# Altium PCB PCB - EE.PcbDoc
Units mm, origin at the board's own origin, x right, y up, seen from the top; angles counter-clockwise.
Board outline 152.4 x 101.6 mm, 2 copper layers (Top Layer, Bottom Layer); 23 components, 15 nets, 54 pads, 0 vias.
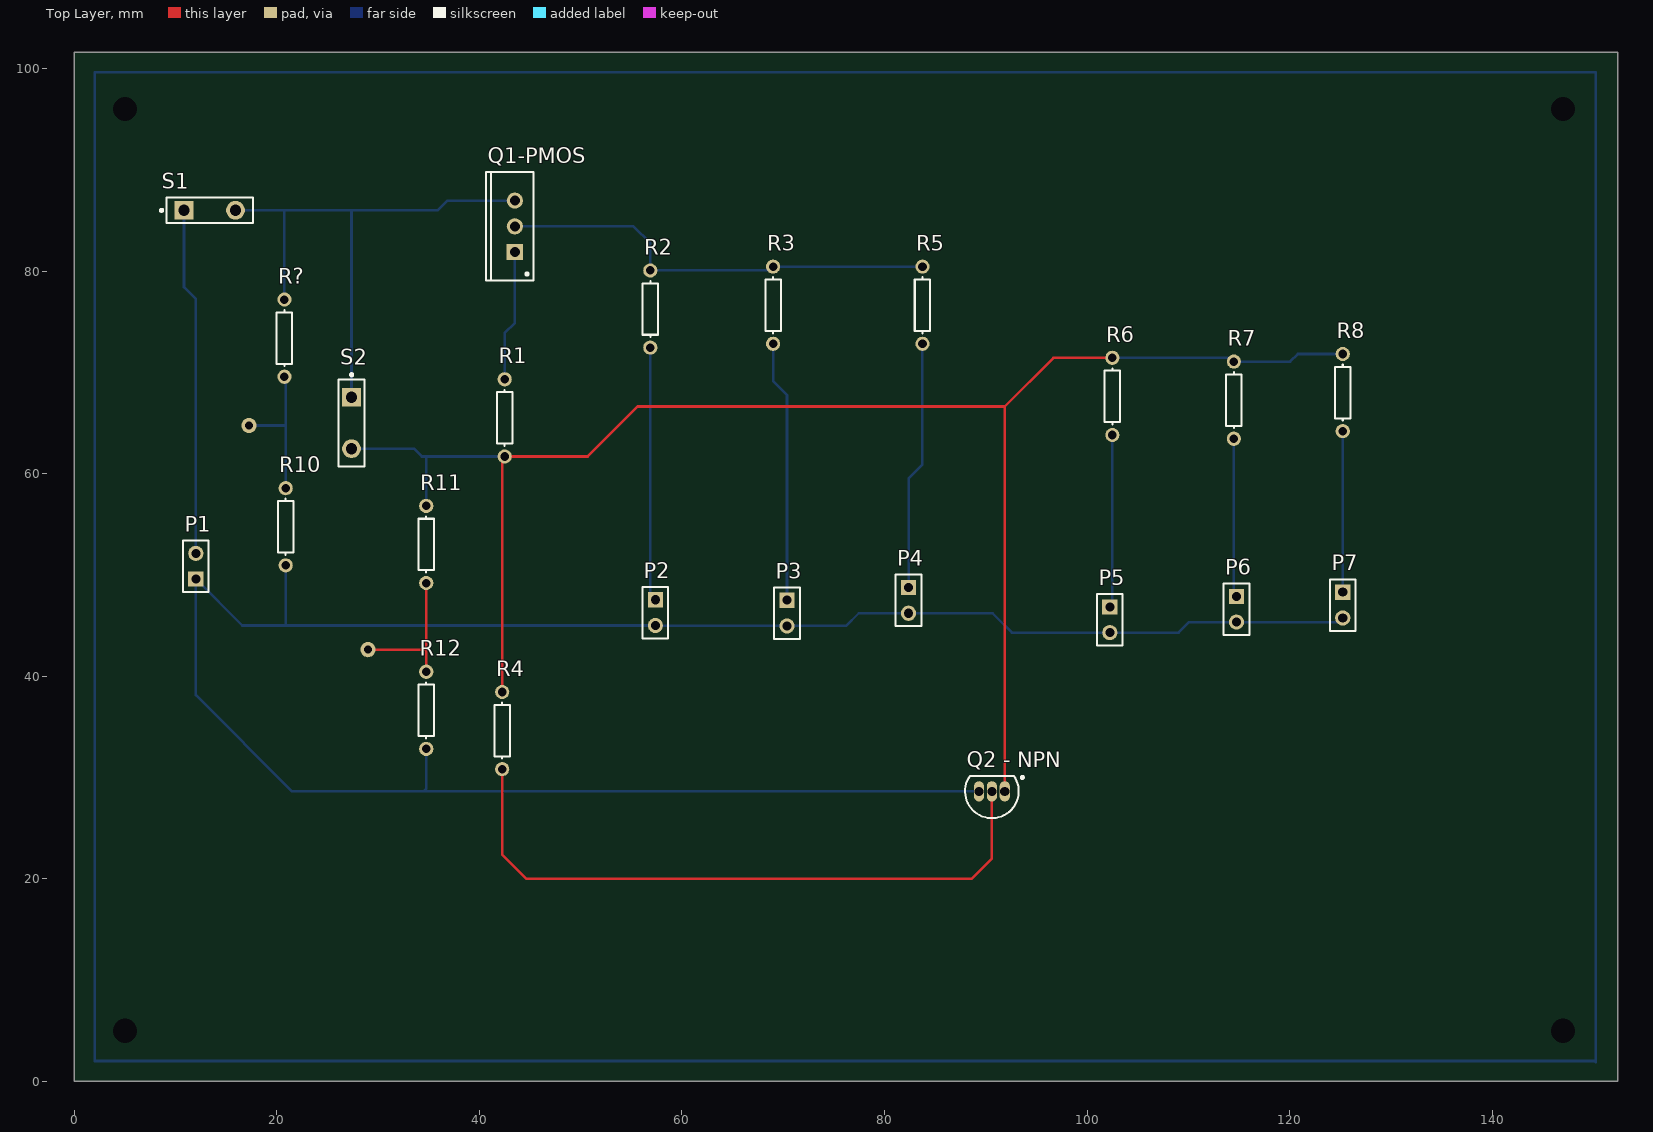
[diagram p0: Top Layer view]
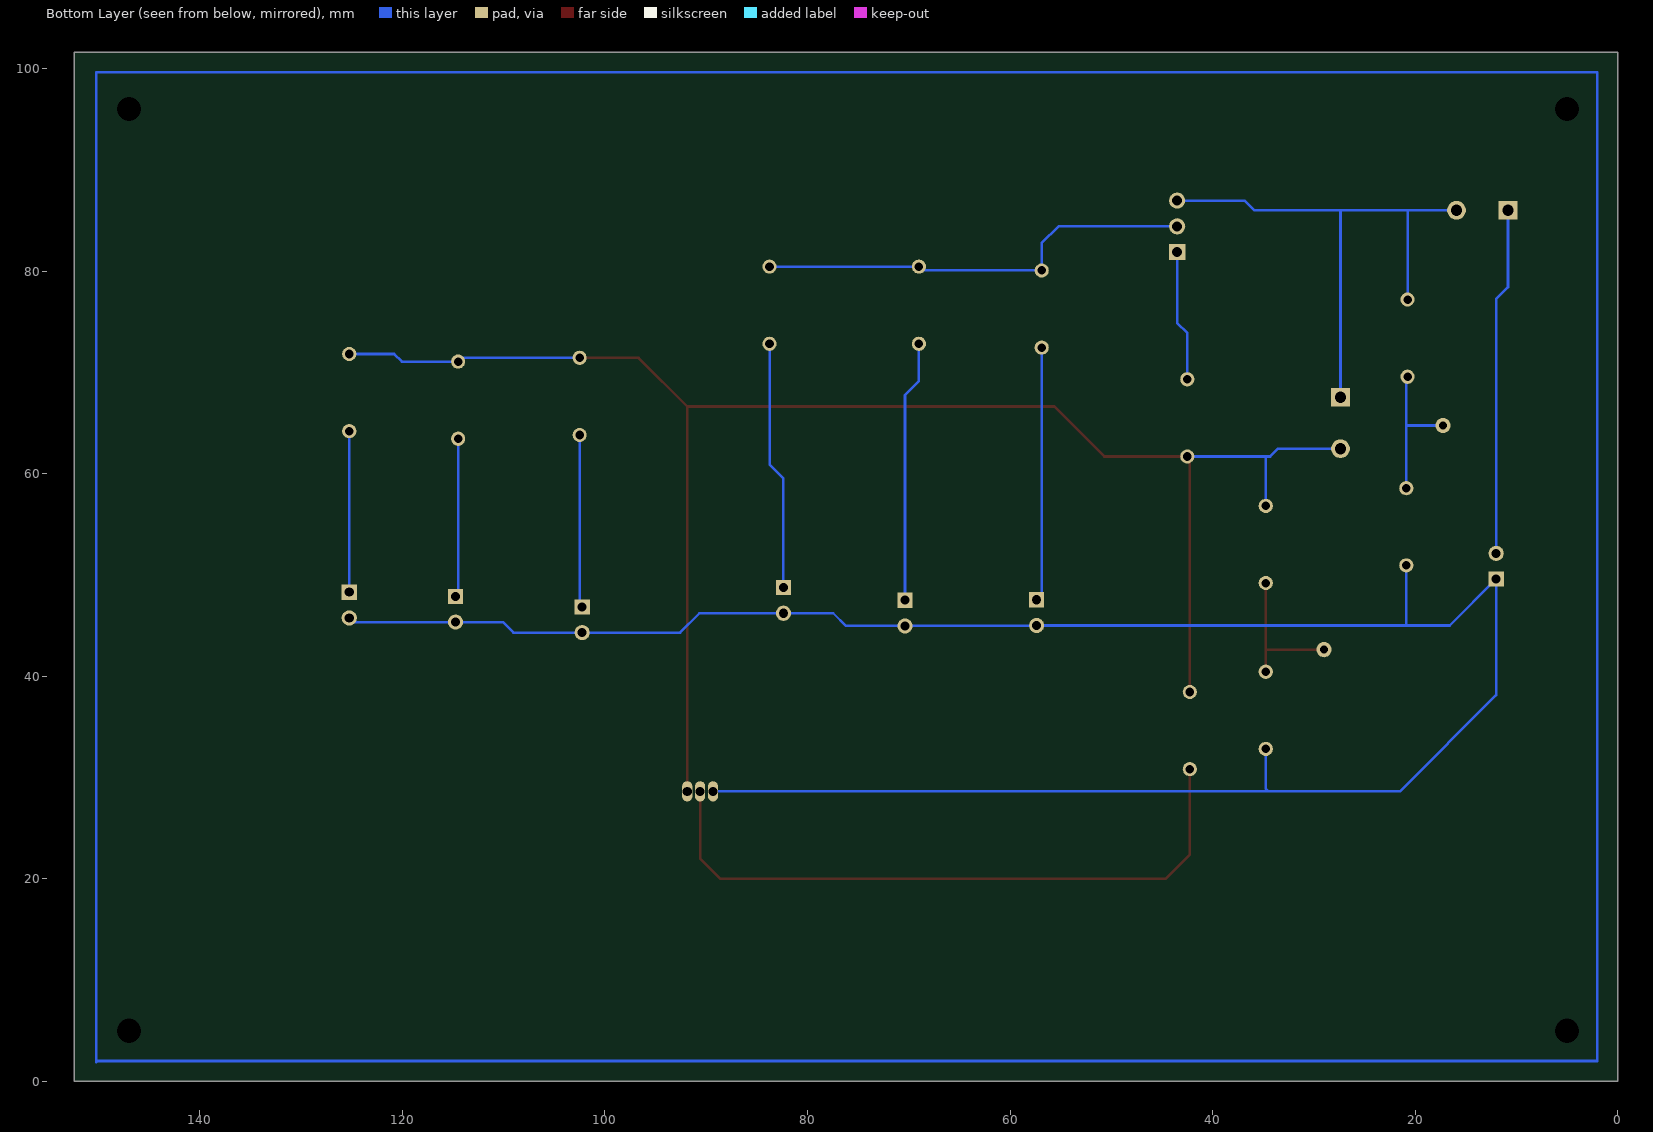
[diagram p1: Bottom Layer view, seen from below]

## Layer stack, top to bottom
Top Solder: solder mask 0.0102, Solder Resist, Dk 3.5
Top Layer: signal copper 0.0356
Dielectric1: dielectric 0.32, FR-4, Dk 4.8
Bottom Layer: signal copper 0.0356
Bottom Solder: solder mask 0.0102, Solder Resist, Dk 3.5

## Board outline
0,0 0,101.6 152.4,101.6 152.4,0

## Design rules (kind name [scope] priority, off if disabled: settings)
Clearance [All] p1: gap=0.25
FabricationTestPointUsage TestPointUsage [All] p1: valid=0 allowmultiple=FALSE
FabricationTestpoint Testpoint [All] p1: side=3 testpointundercomponent=TRUE minsize=1.016 maxsize=2.54 preferedsize=1.524 minholesize=0 maxholesize=1.016 preferedholesize=0.813 testpointgrid=0.025 allowsidetop=TRUE allowsidebottom=TRUE usegrid=TRUE gridtolerance=0
PolygonConnect [All] p1: connectstyle=Relief reliefconductorwidth=0.254 reliefentries=4 polygonreliefangle="90 Angle" airgapwidth=0.254
RoutingVias [All] p1: holewidth=0.6 width=1 viastyle="Through Hole" minholewidth=0.6 minwidth=1 maxholewidth=0.6 maxwidth=1
SilkToSolderMaskClearance SilkscreenOverComponentPads [IsPad] p1: minsilkscreentomaskgap=0.254 clearancetoexposedcopper=TRUE
SolderMaskExpansion [All] p1: expansion=0.102
Width Width_1 [All] p1: maxlimit=0.254 minlimit=0.254 preferedwidth=0.254
Width Width_Power [(InNet('12V DC') OR InNet('GND') OR InNet('INCANDESCENT LOAD') OR InNet('NetP2_1') OR InNet('NetP3_1') OR InNet('NetP4_1'))] p2: maxlimit=0.25 minlimit=0.25 preferedwidth=0.25 minimp=50.000000 maximp=50.000000 favimp=50.000000
27 further rules are at their usual default settings.

## Components (designator, comment, footprint, x,y, rotation, side; value= is the part's Value field where it differs from the comment)
P1 "Connector1 - DC Source" HDR1X2 12,49.585 r90 top
P2 "Connector2 - Incandescent" HDR1X2 57.375,47.54 r270 top
P3 "Incandescent" HDR1X2 70.375,47.5 r270 top
P4 "Incandescent" HDR1X2 82.375,48.75 r270 top
P5 "Connector3 - LED" HDR1X2 102.25,46.835 r270 top
P6 "LED" HDR1X2 114.75,47.875 r270 top
P7 "LED" HDR1X2 125.25,48.29 r270 top
Q1-PMOS "IRF9640" TO-220AB 43.5,84.415 r90 top
"Q2 - NPN" "IRF640" TO-226-AA 90.605,28.625 r90 top
R1 "Res1" AXIAL-0.3 42.5,65.5 r90 top
R2 "Res1" AXIAL-0.3 56.875,76.25 r90 top
R3 "Res1" AXIAL-0.3 69,76.625 r90 top
R4 "Res1" AXIAL-0.3 42.25,34.625 r90 top
R5 "Res1" AXIAL-0.3 83.75,76.625 r90 top
R6 "Res1" AXIAL-0.3 102.5,67.625 r90 top
R7 "Res1" AXIAL-0.3 114.5,67.25 r270 top
R8 "Res1" AXIAL-0.3 125.25,68 r270 top
R10 "Res1" AXIAL-0.3 20.875,54.75 r90 top
R11 "Res1" AXIAL-0.3 34.75,53 r90 top
R12 "Res1" AXIAL-0.3 34.75,36.625 r90 top
R? "Res1" AXIAL-0.3 20.75,73.375 r90 top
S1 "SW-PB" SPST-2 13.375,86 r0 top
S2 "SW-PB" SPST-2 27.375,65 r270 top

## Footprints (in the part's own frame and the unit in brackets; to place one, negate y for a bottom-side part, rotate by r counter-clockwise, add the part's x,y. Pads: shape width x height; smd on the part's side, far side on the other; paste and mask are expansions set on the pad)
AXIAL-0.3 [mm] "Axial Device, Thru-Hole; 2 Leads; 0.3 in Pin Spacing"
  round 1.4 hole 0.85: 1(-3.81,0) 2(3.81,0)
  silkscreen extent -2.77,-0.76 2.77,0.76
HDR1X2 [mm] "Connector; Header; 2 Position"
  rect 1.5x1.5 hole 0.9: 1(0,0)
  round 1.5 hole 0.9: 2(2.54,0)
  silkscreen extent -1.27,-1.27 3.81,1.27
SPST-2 [mm] "Switch; 2 Leads"
  rect 1.85x1.85 hole 1.1: 1(-2.54,0)
  round 1.85 hole 1.1: 2(2.54,0)
  silkscreen extent -4.89,-1.27 4.28,1.27
TO-220AB [mm] "TO, Thru-Hole, Vertical, Heatsink Mounted; 3 In-Line Leads; Pitch 2.54 mm"
  rect 1.6x1.6 hole 1: 1(-2.54,0)
  round 1.6 hole 1: 2(0,0) 3(2.54,0)
  silkscreen extent -5.35,-1.85 5.35,2.85, body extent -5.4,-1.9 5.4,2.9, height 19.3
TO-226-AA [mm] "TO, Flat Index; 3 In-Line, Axial Leads; Body Dia. 4.8mm; Leads 0.55 x 0.51 mm (max)"
  oval 2x1 hole 0.9: 1(0,-1.27) 2(0,0) 3(0,1.27)
  silkscreen extent -2.65,-3.13 1.52,2.65, body extent -2.66,-2.66 1.52,2.66, height 5.33

## Part data
P1 P2 P3 P4 P5 P6 P7: library part "Header 2", "Header, 2-Pin"
Q1-PMOS: library part PMOS-2, "P-Channel Power MOSFET"
"Q2 - NPN": library part NPN, "NPN Bipolar Transistor"
R1 R2 R3 R4 R5 R6 R7 R8 R10 R11 R12 R?: "Resistor"
S1 S2: "Switch"

## Free pads (board coordinates)
  round 1.524 hole 2.4 unplated: 0(5,96) 1(5,5) 2(147,96) 3(147,5)
  round 1.524 hole 0.762: 5(29,42.625) 6(17.25,64.75)

## Nets (pads, with @x,y where several pads share a name; then routed paths per layer and width w, separated by ;. In a path a pad name is that pad's centre, name@x,y a point inside that pad or via, vN(x,y) a via of type N, cw(c..) or ccw(c..) an arc to the next point about the centre after c; other vN are vias at no path point)
"12V DC": P1.2 S1.1 | length 34.4
  Bottom Layer w0.254: S1.1 10.835,78.415 12,77.25 P1.2
GND: "Q2 - NPN.3" P1.1 P2.2 P3.2 P4.2 P5.2 P6.2 P7.2 R10.1 R12.1 | length 220
  Bottom Layer w0.254: R10.1 20.875,45 ; R12.1 34.75,28.875 34.5,28.625 ; 89.335,28.625 34.5,28.625 ; P7.2 124.835,45.335 P6.2 110.085,45.335 109.045,44.295 P5.2 92.58,44.295 90.665,46.21 P4.2 77.46,46.21 76.21,44.96 P3.2 57.415,44.96 P2.2 20.875,45 ; 20.875,45 16.585,45 P1.1 12,38.125 21.5,28.625 34.5,28.625
"INCANDESCENT LOAD": Q1-PMOS.2 R2.2 R3.2 R5.2 | length 43.8
  Bottom Layer w0.254: Q1-PMOS.2 55.21,84.415 56.875,82.75 R2.2 68.625,80.06 R3.2 R5.2
"LED LOAD": "Q2 - NPN.1" R1.1 R4.2 R6.2 R7.1 R8.1 R11.2 S2.2 | length 168.9
  Top Layer w0.254: R4.2 42.25,61.44 R1.1 50.69,61.69 55.625,66.625 91.875,66.625 ; 91.875,28.625 91.875,66.625 ; R6.2 96.685,71.435 91.875,66.625
  Bottom Layer w0.254: S2.2 33.545,62.46 34.315,61.69 34.75,61.69 ; R11.2 34.75,61.69 ; R1.1 34.75,61.69 ; R6.2 114.125,71.435 R7.1 120.06,71.06 120.81,71.81 R8.1
NetP2_1: P2.1 R2.1 | length 25.1
  Bottom Layer w0.254: R2.1 56.875,48.04 P2.1
NetP3_1: P3.1 R3.1 | length 25.9
  Bottom Layer w0.254: R3.1 69,69.125 70.375,67.75 P3.1
NetP4_1: P4.1 R5.1 | length 24.6
  Bottom Layer w0.254: P4.1 82.375,59.5 83.75,60.875 R5.1
NetP5_1: P5.1 R6.1 | length 17.1
  Bottom Layer w0.254: P5.1 102.5,47.085 R6.1
NetP6_1: P6.1 R7.2 | length 15.7
  Bottom Layer w0.254: R7.2 114.5,48.125 P6.1
NetP7_1: P7.1 R8.2 | length 15.9
  Bottom Layer w0.254: P7.1 R8.2
NetQ1-PMOS_1: Q1-PMOS.1 R1.2 | length 13
  Bottom Layer w0.254: R1.2 42.5,73.875 43.5,74.875 Q1-PMOS.1
NetQ1-PMOS_3: Q1-PMOS.3 R?.2 S1.2 S2.1 | length 55.3
  Bottom Layer w0.254: S1.2 20.625,86 ; R?.2 20.75,85.875 20.625,86 ; S2.1 27.375,86 ; Q1-PMOS.3 36.83,86.955 35.875,86 27.375,86 ; 20.625,86 27.375,86
"NetQ2 - NPN_2": "Q2 - NPN.2" R4.1 | length 65.2
  Top Layer w0.254: R4.1 42.25,22.375 44.625,20 88.625,20 90.605,21.98 90.605,28.625
NetR10_2: pad.6 R10.2 R?.1 | length 14.7
  Bottom Layer w0.254: pad.6 20.875,64.75 ; R?.1 20.875,69.44 20.875,64.75 ; R10.2 20.875,64.75
NetR11_1: pad.5 R11.1 R12.2 | length 14.5
  Top Layer w0.254: pad.5 34.75,42.625 ; R12.2 34.75,42.625 ; R11.1 34.75,42.625
copper on no net: | length 491.9
  Bottom Layer w0.254: 2,2 150.125,2 150.25,1.875 150.25,2.375 150.25,99.625 2,99.625 2,2

## Silkscreen, mask and mechanical layers (free items; w line width, h text height)
Mechanical 16:
  drawing of 1874 lines, arcs and shapes, not listed
  text "1" at -29.286,135.509 h1.78
  text "2" at 43.358,135.509 h1.78
  text "3" at 116.51,135.509 h1.78
  text "4" at 189.408,135.509 h1.78
  text "A" at -63.627,112.497 h1.78
  text "A" at 223.393,112.497 h1.78
  text "B" at -63.627,64.44 h1.78
  text "B" at 223.393,64.44 h1.78
  text "C" at 132.393,55.926 h1.78
  text "C" at -63.627,15.926 h1.78
  text "ENGINEER:" at 108.458,-21.082 h1.14
  text "TITLE:" at 146.558,-21.082 h1.14
  text "PCB DESIGNER:" at 108.458,-28.575 h1.14
  text "D" at -63.627,-32.08 h1.78
  text "D" at 223.393,-32.08 h1.78
  text "DATE:" at 108.458,-36.322 h1.14
  text "PART NO.:" at 146.558,-36.322 h1.14
  text "REV:" at 199.898,-36.322 h1.14
  text "Altium Limited" at 75.438,-38.862 h1.78
  text ".PRINT_DATE" at 109.728,-39.37 h1.78
  text "12a Rodborough Rd" at 75.438,-41.402 h1.78
  text "Frenchs Forest" at 75.438,-43.942 h1.78
  text "FILE NAME:" at 108.458,-43.942 h1.14
  text "DWG NO:" at 146.558,-43.942 h1.14
  text "SCALE:" at 199.898,-43.942 h1.14
  text "NSW 2086" at 75.438,-46.482 h1.78
  text ".PCB_FILE_NAME_NO_PATH" at 109.728,-46.99 h1.78
  text "1" at -29.286,-52.451 h1.78
  text "2" at 43.358,-52.451 h1.78
  text "3" at 116.51,-52.451 h1.78
  text "4" at 189.408,-52.451 h1.78